# Altium PCB Device.PcbDoc (part 4 of 4)
Units mm, origin at the board's own origin, x right, y up, seen from the top; angles counter-clockwise.
Board outline 139.06 x 99.82 mm, 4 copper layers (Top Layer, GND, PWR, Bottom Layer), stack 1.233 mm thick; 189 components, 163 nets, 636 pads, 1007 vias.
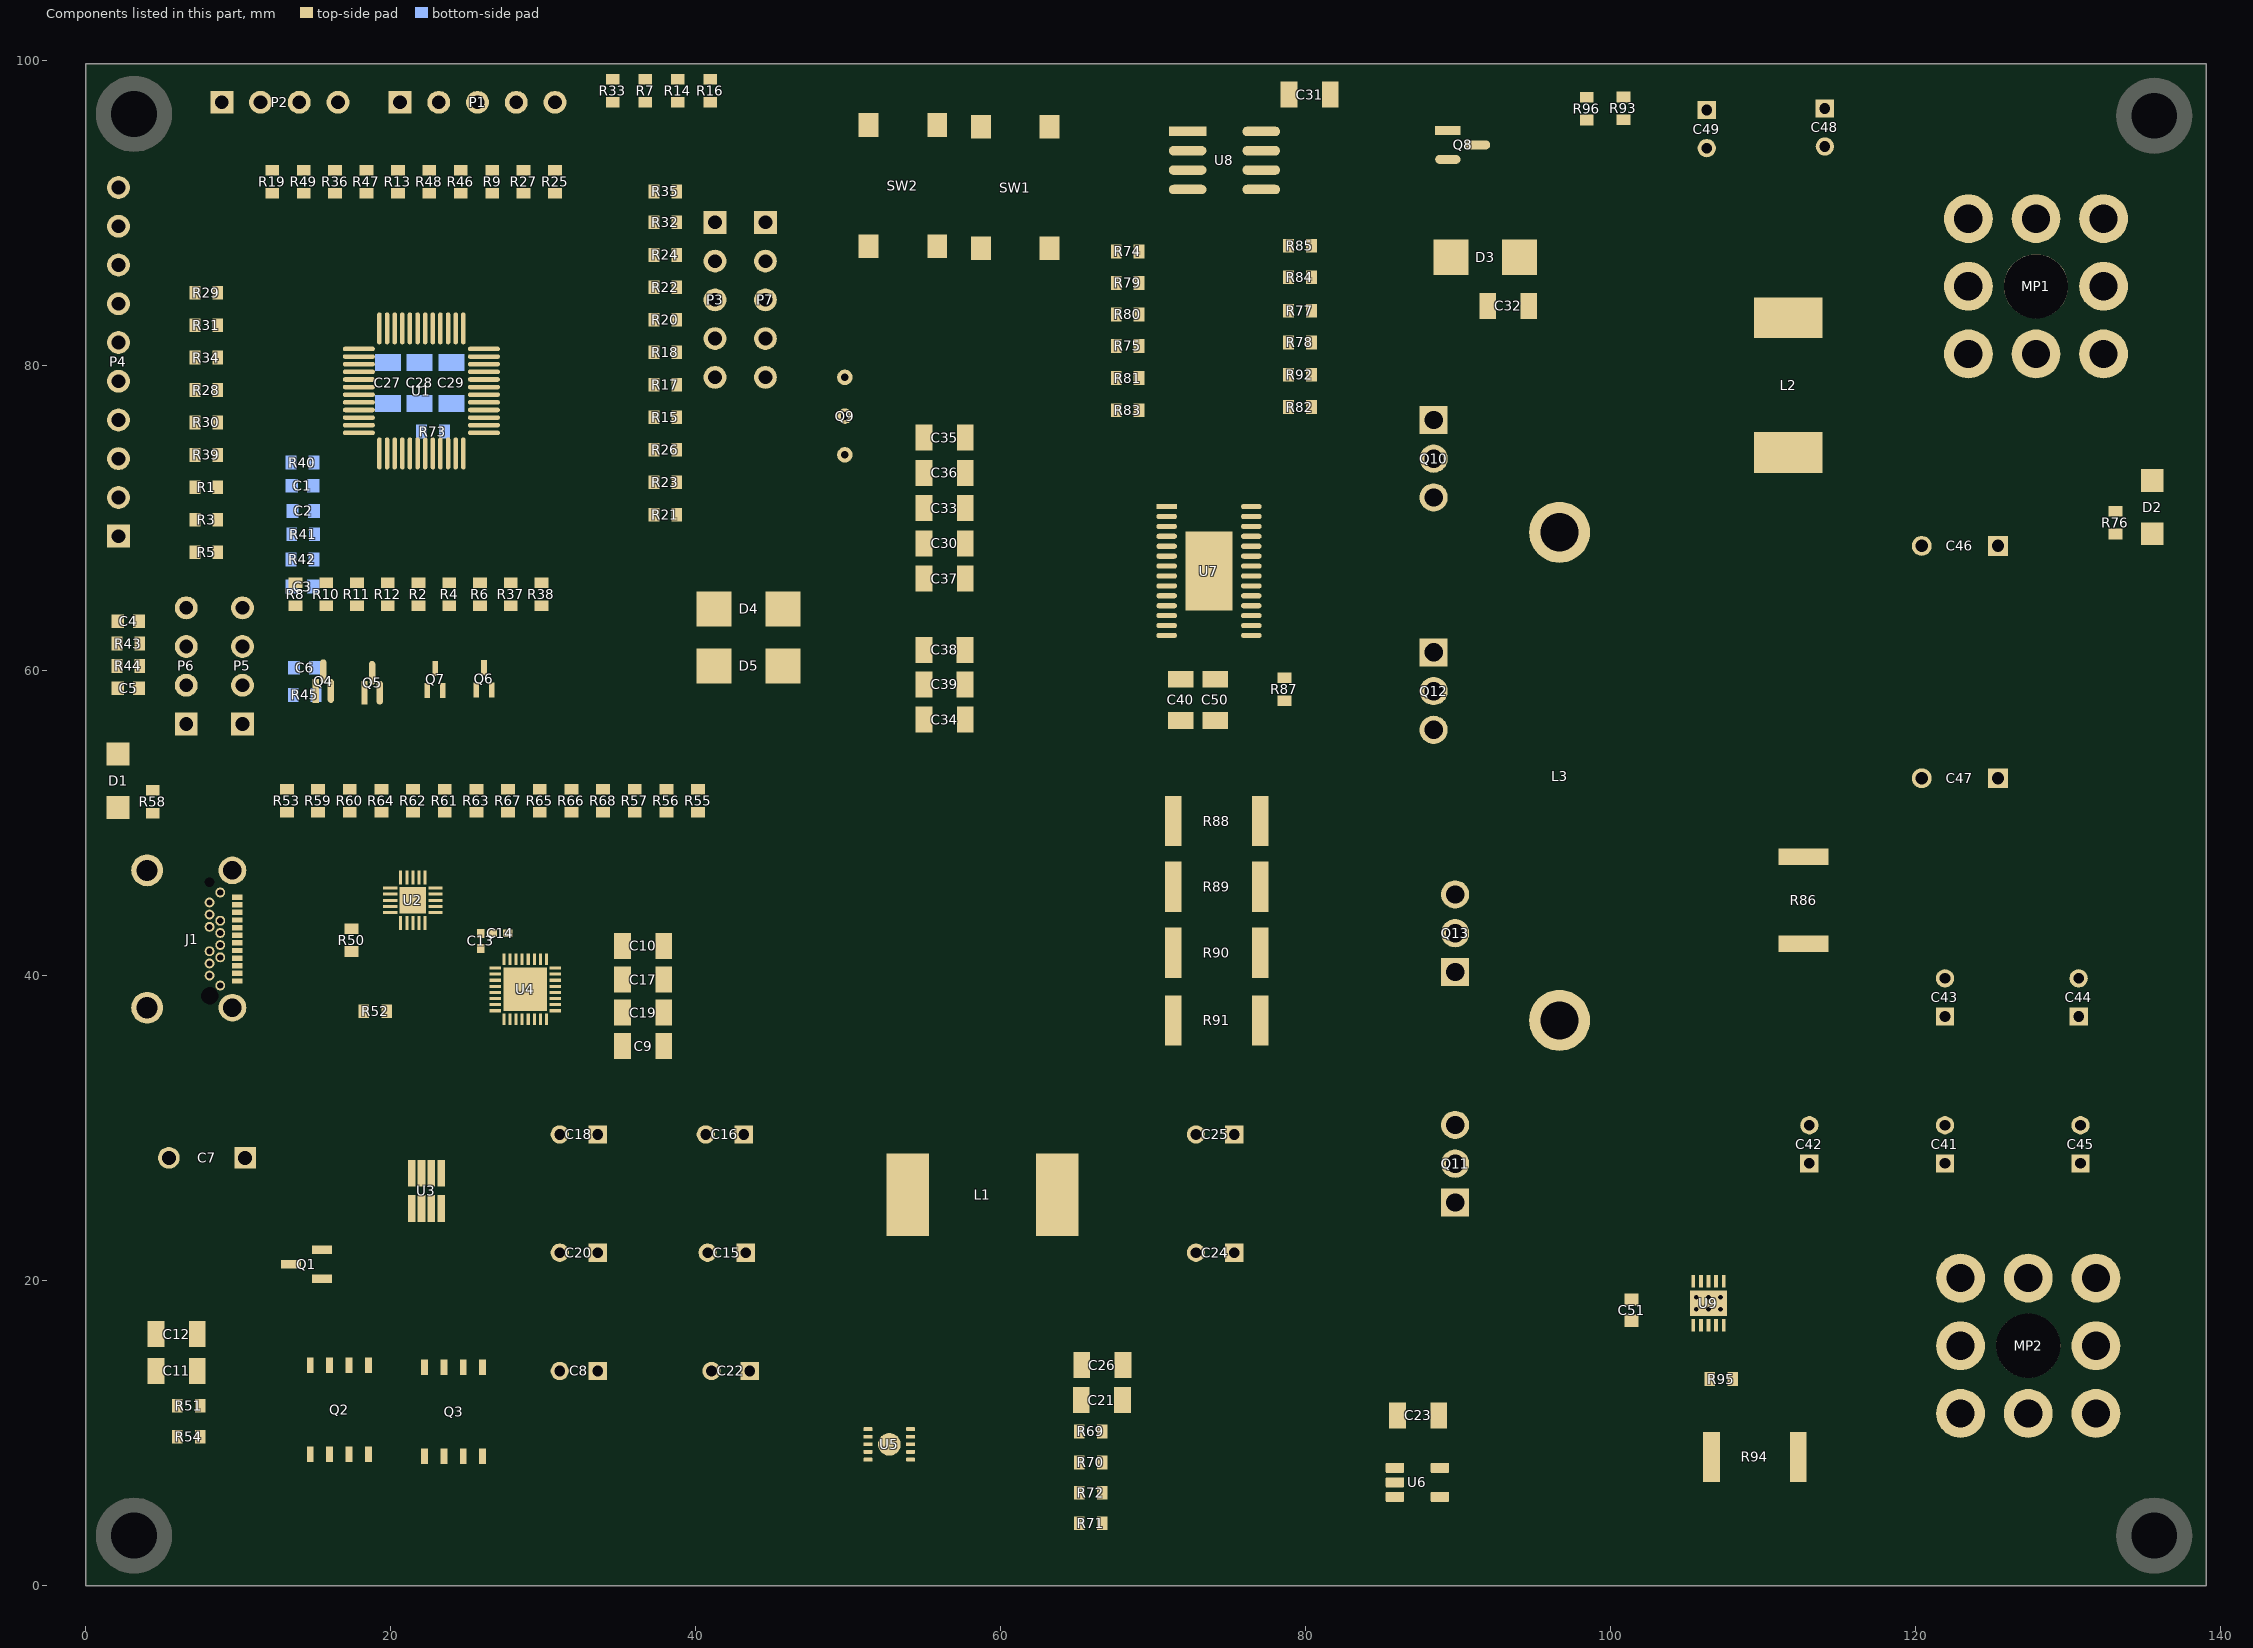
[diagram p5: the components of this part, seen from the top]

## Polygon pours and split planes (outlines as drawn) (continued)
VBUS on PWR "PWR-VBUS" (solid, remove dead copper, pour order 30): 5.461,12.573 10.287,7.747 18.415,7.747 20.574,9.906 20.574,17.78 26.416,23.622 26.416,29.718 21.844,34.29 18.288,34.29 16.891,35.687 16.891,38.354 15.494,39.751 14.224,41.021 14.224,43.053 12.319,44.958 9.349,44.958 8.001,43.939 8.001,43.18 9.017,43.18 9.017,41.91 8.346,41.239 8.346,40.422 9.017,39.751 10.414,38.529 10.414,37.338 9.779,36.703 8.763,36.703 6.985,34.925 6.985,26.416 5.461,24.892
GND on Bottom Layer "GNDpour" (solid, remove dead copper, pour order 54): 0,99.822 139.065,99.822 139.065,0 0,0
PPEXT on Bottom Layer "PPEXT" (solid, remove dead copper, pour order 47): 21.082,9.652 21.082,17.78 23.368,20.066 59.944,20.066 67.437,27.559 76.694,27.559 78.97,29.835 88.265,29.845 89.154,28.956 91.186,28.956 91.694,28.448 91.694,26.924 91.186,26.416 88.646,26.416 88.265,26.035 88.265,16.891 78.232,6.858 23.876,6.858
NetC41_2 on Bottom Layer "VOSNS" (solid, remove dead copper, pour order 45): 89.662,75.184 91.059,76.581 106.172,76.581 116.84,65.913 116.84,51.689 120.904,47.625 130.683,47.625 135.89,42.418 135.89,31.75 132.842,28.702 109.22,28.702 95.123,42.799 95.123,59.69 89.916,64.897 89.916,71.446 88.845,72.517 87.249,72.517 86.722,73.044 86.722,74.53 87.376,75.184
GND on GND "GND" (solid, remove dead copper, pour order 6): 0,99.822 139.065,99.822 139.065,0 0,0

## Silkscreen, mask and mechanical layers (free items; w line width, h text height)
Top Overlay:
  text "VCC" at 136.398,82.931 h1.52 r90
  text "GND" at 136.017,13.462 h1.52 r90

## Text inside footprints (layer, text, board x,y; h text height)
U4: Mechanical 13 "*" at 27.864,37.211 h1.27 r90; Top Overlay "*" at 27.864,35.819 h1.27 r90